# Altium PCB Dashboard_10.0.PcbDoc (part 3 of 3)
Units mm, origin at the board's own origin, x right, y up, seen from the top; angles counter-clockwise.
Board outline 113 x 67 mm, 2 copper layers (Top Layer, Bottom Layer), stack 1.671 mm thick; 178 components, 204 nets, 614 pads, 115 vias.
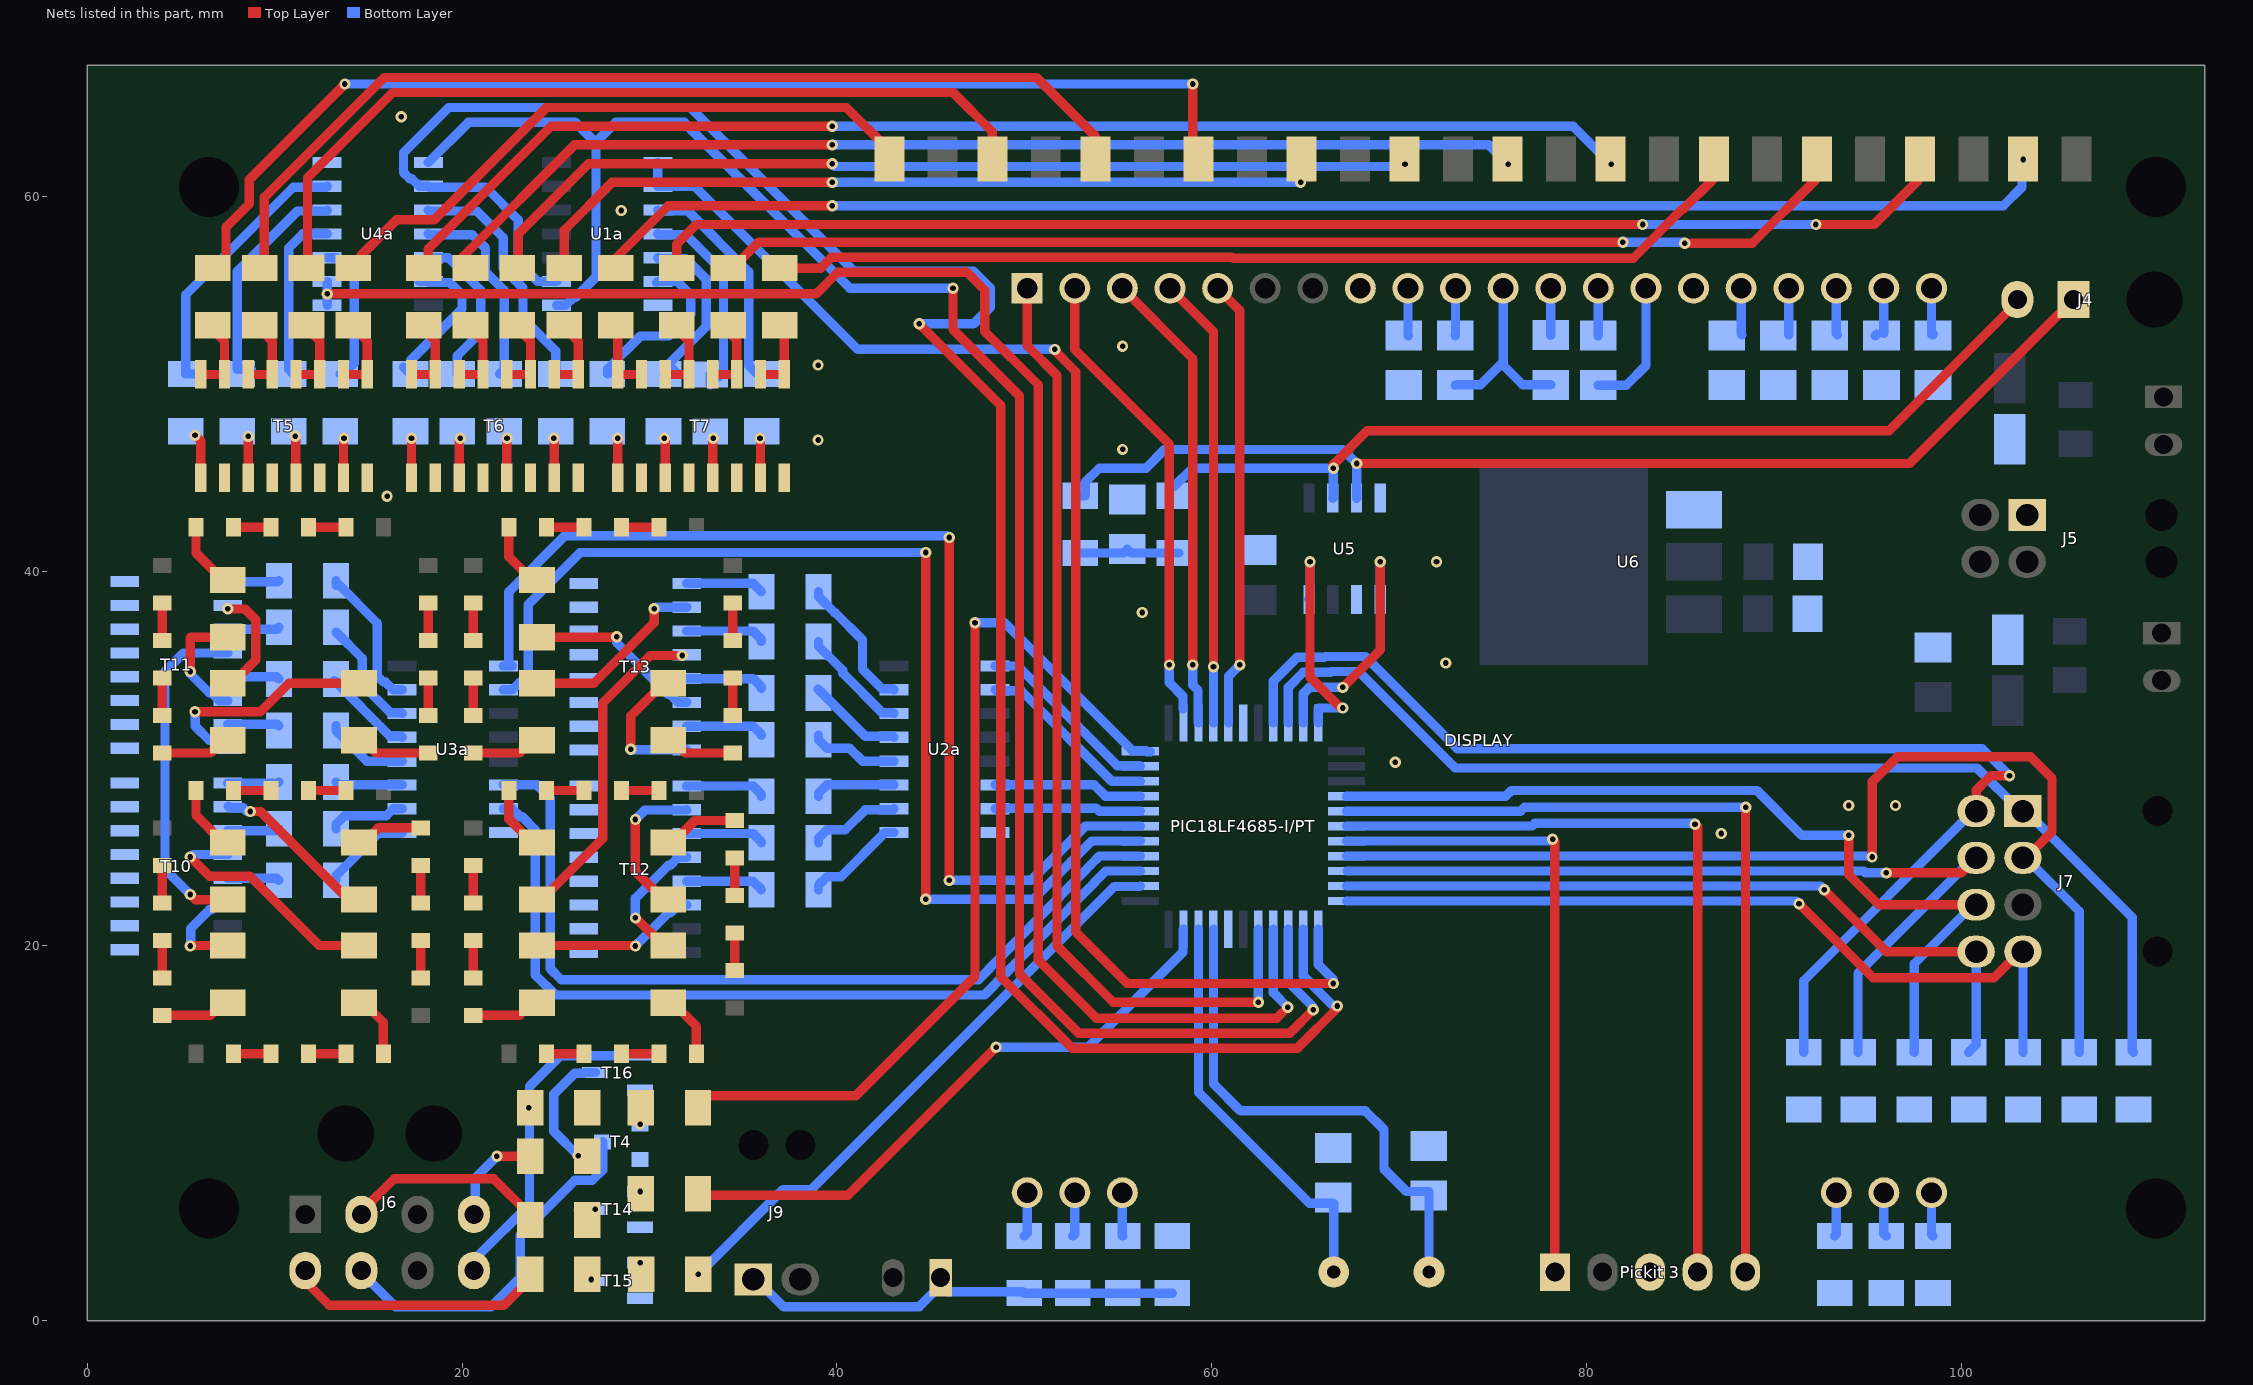
[diagram p2: the nets of this part, all layers, seen from the top]

## Via types
v1: diameter 0.6, hole 0.3, Top Layer to Bottom Layer, 115 vias

## Nets (pads, with @x,y where several pads share a name; then routed paths per layer and width w, separated by ;. In a path a pad name is that pad's centre, name@x,y a point inside that pad or via, vN(x,y) a via of type N, cw(c..) or ccw(c..) an arc to the next point about the centre after c; other vN are vias at no path point) (continued)
A1: R45.2 T13.13 | length 4.2
  Bottom Layer w0.5: T13.13@32,34.27 35.525,34.27 35.975,33.82 R45.2@35.975,33.75
A2: R52.2 T11.13 | length 2.8
  Bottom Layer w0.5: T11.13@7.5,34.365 10.11,34.365 R52.2@10.225,34.25
B1: R46.2 T13.15 | length 4.2
  Bottom Layer w0.5: T13.15@32,31.73 35.525,31.73 35.975,31.28 R46.2@35.975,31.25
B2: R53.2 T11.15 | length 2.8
  Bottom Layer w0.5: T11.15@7.5,31.825 10.15,31.825 R53.2@10.225,31.75
BG1: R34.1 T5.15 | length 2.1
  Top Layer w0.5: T5.15@13.675,45 13.675,47.075 v1(13.7,47.1)
BG2: R37.1 T5.13 | length 2.3
  Top Layer w0.5: v1@11.1,47.1 v1(11.1,47.2) 11.135,47.165 T5.13@11.135,45
BG3: R40.1 T5.11 | length 2.2
  Top Layer w0.5: T5.11@8.595,45 v1(8.595,47.195) v1@8.6,47.2
BG4: R60.1 T5.9 | length 2.4
  Top Layer w0.5: v1(5.75,47.25) 6.055,46.945 T5.9@6.055,45
BG5: R41.2 T6.15 | length 2.1
  Top Layer w0.5: v1(24.9,47.1) 24.925,47.075 T6.15@24.925,45
BG6: R38.2 T6.13 | length 2.1
  Top Layer w0.5: T6.13@22.385,45 22.385,47.085 v1(22.4,47.1)
BG7: R35.2 T6.11 | length 2.1
  Top Layer w0.5: T6.11@19.845,45 19.845,47.045 v1(19.9,47.1)
BG8: R12.2 T6.9 | length 2.1
  Top Layer w0.5: v1(17.3,47.1) 17.305,47.095 T6.9@17.305,45
BG9: R33.1 T7.15 | length 2.1
  Top Layer w0.5: v1(35.9,47.1) 35.925,47.075 T7.15@35.925,45
BG10: R36.1 T7.13 | length 2.1
  Top Layer w0.5: T7.13@33.385,45 33.385,47.085 v1(33.4,47.1)
BG11: R39.1 T7.11 | length 2.1
  Top Layer w0.5: v1(30.8,47.1) 30.845,47.055 T7.11@30.845,45
BG12: R57.1 T7.9 | length 2.1
  Top Layer w0.5: v1(28.3,47.1) 28.305,47.095 T7.9@28.305,45
BUZZER: J6.7 T4.3 | length 19.7
  Top Layer w0.5: J6.7@14.63,2.525 J6.7@14.63,2.675
  Bottom Layer w0.5: J6.7@14.6,2.6 16.45,0.75 21.543,0.75 23.1,2.307 23.1,4.578 26.022,7.5 26.954,7.5 27.5,8.046 T4.3@27.5,9.546
C1: R47.2 T12.9 | length 4.3
  Bottom Layer w0.5: T12.9@32,28.54 35.525,28.54 35.975,28.09 R47.2@35.975,28
C2: R54.2 T10.9 | length 2.7
  Bottom Layer w0.5: T10.9@7.5,28.695 10.17,28.695 R54.2@10.225,28.75
CANH: J4.1 R200.1 U5.7 | length 60.3
  Top Layer w0.5: v1(67.75,45.75) 97.25,45.75 105.25,53.75 105.4,53.75 106,54.35 J4.1@106,54.5
  Bottom Layer w0.5: R200.1@53,44.025 53.25,44.025 53.25,44.75 54,45.5 56.5,45.5 57.492,46.492 67.008,46.492 v1(67.75,45.75) ; U5.7@67.735,43.9 67.742,43.907 67.742,45.735 v1@67.758,45.75
CANL: J4.2 R201.1 U5.6 | length 51
  Top Layer w0.5: v1(66.5,45.5) 66.5,45.702 68.298,47.5 96.15,47.5 103,54.35 J4.2@103,54.5
  Bottom Layer w0.5: R201.1@58,44.525 58.975,45.5 v1(66.5,45.5) 66.5,43.935 U5.6@66.465,43.9
D1: R48.2 T12.11 | length 4.2
  Bottom Layer w0.5: T12.11@32,26 35.525,26 35.975,25.55 R48.2@35.975,25.5
D2: R55.2 T10.11 | length 2.8
  Bottom Layer w0.5: T10.11@7.5,26.155 10.13,26.155 R55.2@10.225,26.25
E1: R49.2 T12.13 | length 4.2
  Bottom Layer w0.5: T12.13@32,23.46 35.525,23.46 35.975,23.01 R49.2@35.975,23
E2: R56.2 T10.13 | length 2.8
  Bottom Layer w0.5: T10.13@7.5,23.615 10.11,23.615 R56.2@10.225,23.5
F1: R43.2 T13.9 | length 4.2
  Bottom Layer w0.5: T13.9@32,39.35 35.525,39.35 R43.2@35.975,38.9
F2: R50.2 T11.9 | length 2.7
  Bottom Layer w0.5: T11.9@7.5,39.445 10.17,39.445 R50.2@10.225,39.5
G1: R44.2 T13.11 | length 4.3
  Bottom Layer w0.5: T13.11@32,36.81 35.525,36.81 35.975,36.36 R44.2@35.975,36.25
G2: R51.2 T11.11 | length 2.8
  Bottom Layer w0.5: T11.11@7.5,36.905 10.13,36.905 R51.2@10.225,37
GND: "Pickit 3.3" C1.2 C3.1 C4.1 C5.1 C6.2 C10.2 C11.2 C12.2 C13.2 C14.2 C15b.2 C16.2 C200.2 D1.2 D2.2 DISPLAY.26 DISPLAY.33 J5.1 PIC18LF4685-I/PT.6 PIC18LF4685-I/PT.29 R1.1 R2.1 R3.1 R4.1 R5.1 R6.1 R7.1 R67.2 R68.2 R69.2 R70.2 R78.1 T4.2 T5.10 T5.12 T5.14 T5.16 T6.10 T6.12 T6.14 T6.16 T7.10 T7.12 T7.14 T7.16 T10.1 T10.2 T10.3 T10.4 T10.5 T10.6 T10.7 T10.8 T11.1 T11.2 T11.3 T11.4 T11.5 T11.6 T11.7 T11.8 T12.1 T12.2 T12.3 T12.4 T12.5 T12.6 T12.7 T12.8 T13.1 T13.2 T13.3 T13.4 T13.5 T13.6 T13.7 T13.8 T14.2 T15.2 T16.2 U1a.7 U2a.8 U3a.8 U4a.7 U5.2 U5.8 U6.3
  other v1: 87.2,26 94,27.5 96.5,27.5 69.8,29.8 72.5,35.1 56.3,37.8 72,40.5 16,44 55.25,46.5 39,47 39,51 55.25,52 28.5,59.25 16.75,64.25
LED_AMS: J6.2 R71.2 | length 11.8
  Top Layer w0.5: J6.2@14.63,5.675 14.63,5.825 16.38,7.575 21.685,7.575 23.635,5.625 R71.2@23.635,5.375 23.635,5.125 R71.2@23.185,4.675
LED_IMD: J6.8 R72.2 | length 14.1
  Top Layer w0.5: J6.8@11.63,2.675 11.63,2.105 12.91,0.825 22.235,0.825 23.635,2.225 R72.2@23.635,2.475 R72.2@23.535,2.375
LED_TS: J6.4 R79.2 | length 6.3
  Top Layer w0.5: v1(21.86,8.775) R79.2@23.635,8.775 23.635,9.025 R79.2@23.185,9.475
  Bottom Layer w0.5: J6.4@20.7,5.6 20.7,7.615 v1(21.86,8.775)
MCLR: "Pickit 3.1" PIC18LF4685-I/PT.18 | length 34.2
  Top Layer w0.5: v1(78.2,25.7) 78.32,25.58 78.32,2.6
  Bottom Layer w0.5: PIC18LF4685-I/PT.18@67.2,25.6 78.073,25.6 78.173,25.7 v1(78.2,25.7)
NetC6_1: C6.1 DISPLAY.32 | length 2.5
  Bottom Layer w0.5: DISPLAY.32@70.48,55.1 70.48,52.595 C6.1@70.5,52.575
NetC7_1: C7.1 DISPLAY.31 | length 2.5
  Bottom Layer w0.5: C7.1@73,52.575 73.02,52.595 DISPLAY.31@73.02,55.1
NetC7_2: C7.2 C8.2 DISPLAY.30 | length 10.2
  Bottom Layer w0.5: C7.2@73,49.925 73.025,49.95 74.35,49.95 75.56,51.16 ; DISPLAY.30@75.56,55.1 75.56,51.16 ; C8.2@78.1,49.95 76.6,49.95 75.56,50.99 75.56,51.16
NetC8_1: C8.1 DISPLAY.29 | length 2.5
  Bottom Layer w0.5: C8.1@78.1,52.6 DISPLAY.29@78.1,55.1
NetC9_1: C9.1 DISPLAY.27 | length 7.1
  Bottom Layer w0.5: C9.1@80.625,49.925 82.125,49.925 83.18,50.98 DISPLAY.27@83.18,55.1
NetC9_2: C9.2 DISPLAY.28 | length 2.5
  Bottom Layer w0.5: C9.2@80.625,52.575 80.64,52.59 DISPLAY.28@80.64,55.1
NetC10_1: C10.1 DISPLAY.25 | length 2.5
  Bottom Layer w0.5: DISPLAY.25@88.26,55.1 88.26,52.665 C10.1@88.3,52.625
NetC11_1: C11.1 DISPLAY.24 | length 2.5
  Bottom Layer w0.5: C11.1@90.8,52.625 DISPLAY.24@90.8,55.1
NetC12_1: C12.1 DISPLAY.23 | length 2.5
  Bottom Layer w0.5: DISPLAY.23@93.34,55.1 93.34,52.685 C12.1@93.4,52.625
NetC13_1: C13.1 DISPLAY.22 | length 2.5
  Bottom Layer w0.5: C13.1@95.425,52.575 C13.1@95.505,52.655 ; C13.1@95.88,52.705 DISPLAY.22@95.88,55.1
NetC14_1: C14.1 DISPLAY.21 | length 2.5
  Bottom Layer w0.5: C14.1@98.42,52.645 DISPLAY.21@98.42,55.1 ; C14.1@98.5,52.625 C14.1@98.52,52.645
NetC15b_1: C15b.1 CRYSTAL.2 PIC18LF4685-I/PT.31 | length 22
  Bottom Layer w0.5: PIC18LF4685-I/PT.31@59.3,20.9 59.3,12.2 65.225,6.275 66.5,6.275 66.52,6.255 CRYSTAL.2@66.52,2.6
NetC16_1: C16.1 CRYSTAL.1 PIC18LF4685-I/PT.30 | length 27.7
  Bottom Layer w0.5: PIC18LF4685-I/PT.30@60.1,20.9 60.1,12.65 61.55,11.2 68.2,11.2 69.2,10.2 69.2,8.1 70.4,6.9 71.6,6.9 C16.1@71.6,6.675 CRYSTAL.1@71.6,2.6
NetC200_1: C200.1 R200.2 R201.2 | length 5.7
  Bottom Layer w0.5: R200.2@52.75,40.975 55.3,40.975 C200.1@55.5,41.175 55.7,40.975 R201.2@58.25,40.975
NetD3_1: D3.1 R20.1 | length 33.2
  Top Layer w0.5: R20.1@14.2,56.175 14.578,56.553 14.578,56.828 16.5,58.75 18.5,58.75 24.5,64.75 40.5,64.75 D3.1@42.725,62.525
NetD4_1: D4.1 R21.1 | length 45.9
  Top Layer w0.5: R21.1@11.7,56.175 11.95,56.175 11.75,56.375 11.75,61 16.3,65.55 46.2,65.55 48.3,63.45 D4.1@48.3,62
NetD5_1: D5.1 R22.1 | length 53.4
  Top Layer w0.5: R22.1@9.2,56.175 9.45,56.425 9.45,59.95 15.85,66.35 50.65,66.35 53.8,63.2 D5.1@53.8,62
NetD6_1: D6.1 R23.1 | length 62.3
  Top Layer w0.5: R23.1@6.7,56.175 6.95,56.175 7.4,56.625 7.4,58.359 8.65,59.609 8.65,60.9 v1(13.75,66) ; v1(59,66) 59,62.3 D6.1@59.3,62
  Bottom Layer w0.5: v1(13.75,66) v1(59,66)
NetD7_1: D7.1 R24.1 | length 43.7
  Top Layer w0.5: R24.1@25.45,56.175 25.45,58.2 28,60.75 v1(39.75,60.75) ; v1(64.75,60.75) 64.75,61.95 D7.1@64.8,62
  Bottom Layer w0.5: v1(39.75,60.75) v1(64.75,60.75)
NetD8_1: D8.1 R25.1 | length 51.1
  Top Layer w0.5: R25.1@22.95,56.175 23.2,56.175 23,56.375 23,58 26.75,61.75 v1(39.75,61.75)
  Bottom Layer w0.5: v1(39.75,61.75) 39.9,61.6 v1@70.325,61.6
  other v1: 70.325,61.725
NetD9_1: D9.1 R26.1 | length 59.8
  Top Layer w0.5: R26.1@20.45,56.175 20.7,56.175 20.063,56.813 26,62.75 v1(39.75,62.75)
  Bottom Layer w0.5: v1(39.75,62.75) 74.8,62.75 v1(75.825,61.725)
NetD10_1: D10.1 R27.1 | length 67.9
  Top Layer w0.5: R27.1@17.95,56.175 18.2,56.175 18.2,57.2 24.75,63.75 v1(39.75,63.75)
  Bottom Layer w0.5: v1(39.75,63.75) 79.293,63.75 v1@81.322,61.722
  other v1: 81.325,61.725
NetD11_1: D11.1 R28.1 | length 52.2
  Top Layer w0.5: R28.1@36.95,56.175 39.144,56.175 39.719,56.75 61.109,56.75 61.159,56.7 82.498,56.7 85.148,59.35 85.2,59.35 D11.1@86.725,60.875 ; D11.1@86.8,61.6 D11.1@86.8,62
NetD12_1: D12.1 R29.1 | length 60.4
  Top Layer w0.5: R29.1@34.2,56.175 34.45,56.175 35.825,57.55 v1(81.95,57.55) ; v1(85.25,57.5) 88.85,57.5 D12.1@92.225,60.875 ; D12.1@92.3,61.6 D12.1@92.3,62
  Bottom Layer w0.5: v1(81.95,57.55) 85.2,57.55 v1(85.25,57.5)
NetD13_1: D13.1 R30.1 | length 69.4
  Top Layer w0.5: R30.1@31.45,56.175 31.45,57.45 32.5,58.5 v1(83,58.5) ; v1(92.25,58.5) 95.35,58.5 D13.1@97.725,60.875 ; D13.1@97.8,61.6 D13.1@97.8,62
  Bottom Layer w0.5: v1(83,58.5) v1(92.25,58.5)
NetD14_1: D14.1 R31.1 | length 78.6
  Top Layer w0.5: R31.1@28.2,56.175 28.2,56.7 31,59.5 v1(39.75,59.5)
  Bottom Layer w0.5: v1(39.75,59.5) 102.25,59.5 103.25,60.5 v1@103.25,61.975
  other v1: 103.325,61.975
NetD15_1: D15.1 D22.2 | length 2
  Top Layer w0.5: D15.1@24.5,14.25 D22.2@26.5,14.25
NetD16_1: D16.1 D23.2 | length 2
  Top Layer w0.5: D16.1@34.55,18.7 D23.2@34.55,20.7
NetD17_1: D17.1 D24.2 | length 2
  Top Layer w0.5: D24.2@34.45,36.3 D17.1@34.45,38.3
NetD18_1: D18.1 D25.2 | length 2
  Top Layer w0.5: D25.2@28.5,42.35 D18.1@30.5,42.35
NetD19_1: D19.1 D26.2 | length 2
  Top Layer w0.5: D26.2@28.5,28.3 D19.1@30.5,28.3
NetD20_1: D20.1 D27.2 | length 2
  Top Layer w0.5: D27.2@20.6,36.3 D20.1@20.6,38.3
NetD21_1: D21.1 D28.2 | length 2
  Top Layer w0.5: D28.2@20.6,18.3 D21.1@20.6,20.3
NetD21_2: D21.2 D.1 | length 2
  Top Layer w0.5: D21.2@20.6,22.3 D.1@20.6,24.3
NetD22_1: D22.1 D29.2 | length 2
  Top Layer w0.5: D22.1@28.5,14.25 D29.2@30.5,14.25
NetD23_1: D23.1 D30.2 | length 2
  Top Layer w0.5: D23.1@34.55,22.7 D30.2@34.55,24.7
NetD24_1: D24.1 D31.2 | length 2
  Top Layer w0.5: D31.2@34.45,32.3 D24.1@34.45,34.3
NetD25_1: D25.1 D32.2 | length 2
  Top Layer w0.5: D32.2@24.5,42.35 D25.1@26.5,42.35
NetD26_1: D26.1 D33.2 | length 2
  Top Layer w0.5: D33.2@24.5,28.3 D26.1@26.5,28.3
NetD27_1: D27.1 D34.2 | length 2
  Top Layer w0.5: D34.2@20.6,32.3 D27.1@20.6,34.3
NetD28_1: D28.1 R.2 | length 3.7
  Top Layer w0.5: D28.1@20.6,16.3 23.075,16.3 23.75,16.975 R.2@24,16.975
NetD29_1: D29.1 R42.2 | length 3.5
  Top Layer w0.5: R42.2@31,16.975 31.25,16.975 32.5,15.725 D29.1@32.5,14.25
NetD30_1: D30.1 R58.2 | length 4
  Top Layer w0.5: R58.2@31,25.525 31.25,25.525 32.425,26.7 D30.1@34.55,26.7
NetD31_1: D31.1 R59.2 | length 3.7
  Top Layer w0.5: R59.2@31,30.975 31.25,30.975 31.925,30.3 D31.1@34.45,30.3
NetD32_1: D32.1 R61.2 | length 3.6
  Top Layer w0.5: D32.1@22.5,42.35 22.5,40.775 23.75,39.525 R61.2@24,39.525
NetD33_1: D33.1 R62.2 | length 3.5
  Top Layer w0.5: D33.1@22.5,28.3 22.5,26.775 23.75,25.525 R62.2@24,25.525
NetD34_1: D34.1 R63.2 | length 3.7
  Top Layer w0.5: D34.1@20.6,30.3 23.075,30.3 23.75,30.975 R63.2@24,30.975
NetD35_1: D35.1 D42.2 | length 2
  Top Layer w0.5: D42.2@4,22.3 D35.1@4,24.3
NetD36_1: D36.1 D43.2 | length 2
  Top Layer w0.5: D36.1@7.8,14.25 D43.2@9.8,14.25
NetD37_1: D37.1 D44.2 | length 2
  Top Layer w0.5: D37.1@17.8,18.3 D44.2@17.8,20.3
NetD38_1: D38.1 D45.2 | length 2
  Top Layer w0.5: D45.2@18.2,36.3 D38.1@18.2,38.3
NetD39_1: D39.1 D46.2 | length 2
  Top Layer w0.5: D46.2@11.8,42.35 D39.1@13.8,42.35
NetD40_1: D40.1 D47.2 | length 2
  Top Layer w0.5: D47.2@11.8,28.3 D40.1@13.8,28.3
NetD41_1: D41.1 D48.2 | length 2
  Top Layer w0.5: D48.2@4,36.3 D41.1@4,38.3
NetD42_1: D42.1 D49.2 | length 2
  Top Layer w0.5: D49.2@4,18.3 D42.1@4,20.3
NetD43_1: D43.1 D50.2 | length 2
  Top Layer w0.5: D43.1@11.8,14.25 D50.2@13.8,14.25
NetD44_1: D44.1 D51.2 | length 2
  Top Layer w0.5: D44.1@17.8,22.3 D51.2@17.8,24.3
NetD45_1: D45.1 D52.2 | length 2
  Top Layer w0.5: D52.2@18.2,32.3 D45.1@18.2,34.3
NetD46_1: D46.1 D53.2 | length 2
  Top Layer w0.5: D53.2@7.8,42.35 D46.1@9.8,42.35
NetD47_1: D47.1 D54.2 | length 2
  Top Layer w0.5: D54.2@7.8,28.3 D47.1@9.8,28.3
NetD48_1: D48.1 D55.2 | length 2
  Top Layer w0.5: D55.2@4,32.3 D48.1@4,34.3
NetD49_1: D49.1 R73.2 | length 3.8
  Top Layer w0.5: D49.1@4,16.3 6.575,16.3 7.25,16.975 R73.2@7.5,16.975
NetD50_1: D50.1 R74.2 | length 3.4
  Top Layer w0.5: R74.2@14.5,16.975 14.75,16.975 15.8,15.925 D50.1@15.8,14.25
NetD51_1: D51.1 R75.2 | length 3.6
  Top Layer w0.5: R75.2@14.5,25.525 14.75,25.525 15.525,26.3 D51.1@17.8,26.3
NetD52_1: D52.1 R76.2 | length 4
  Top Layer w0.5: R76.2@14.5,30.975 14.75,30.975 15.425,30.3 D52.1@18.2,30.3
NetD53_1: D53.1 R77.2 | length 3.7
  Top Layer w0.5: D53.1@5.8,42.35 5.8,40.975 7.25,39.525 R77.2@7.5,39.525
NetD54_1: D54.1 R82.2 | length 3.6
  Top Layer w0.5: D54.1@5.8,28.3 5.8,26.975 7.25,25.525 R82.2@7.5,25.525
NetD55_1: D55.1 R83.2 | length 3.8
  Top Layer w0.5: D55.1@4,30.3 6.575,30.3 7.25,30.975 R83.2@7.5,30.975
NetDISPLAY_41: DISPLAY.41 R64.2 | length 2.4
  Bottom Layer w0.5: R64.2@50,4.525 50.16,4.685 DISPLAY.41@50.16,6.84
NetDISPLAY_42: DISPLAY.42 R65.2 | length 2.4
  Bottom Layer w0.5: R65.2@52.6,4.525 52.7,4.625 DISPLAY.42@52.7,6.84
NetDISPLAY_43: DISPLAY.43 R66.2 | length 2.3
  Bottom Layer w0.5: DISPLAY.43@55.24,6.84 55.24,4.535 R66.2@55.25,4.525
NetDISPLAY_44: DISPLAY.44 R68.1 | length 2.3
  Bottom Layer w0.5: DISPLAY.44@98.42,6.84 98.42,4.605 R68.1@98.5,4.525
NetDISPLAY_45: DISPLAY.45 R69.1 | length 2.4
  Bottom Layer w0.5: DISPLAY.45@95.88,6.84 95.88,4.645 R69.1@96,4.525
NetDISPLAY_46: DISPLAY.46 R67.1 | length 2.4
  Bottom Layer w0.5: R67.1@93.25,4.525 93.34,4.615 DISPLAY.46@93.34,6.84
NetJ8_1: J8.1 J9.1 R64.1 R65.1 R66.1 R70.1 | length 24
  Bottom Layer w0.5: J9.1@35.55,2.21 35.7,2.21 37.16,0.75 44.39,0.75 J8.1@45.54,1.9 ; J8.1@45.54,2.3 J8.1@45.54,1.9 ; R70.1@57.9,1.475 R66.1@55.25,1.475 R65.1@52.6,1.475 R64.1@50,1.475 49.925,1.55 45.89,1.55 J8.1@45.54,1.9
NetR12_1: R12.1 U4a.13 | length 8.8
  Bottom Layer w0.5: R12.1@16.875,50.9 R12.1@17.25,50.525 17.5,50.525 17.25,50.775 17.25,51.25 20,54 20,54.75 19.34,55.41 18.25,55.41 U4a.13@18.2,55.46 U4a.13@17.725,55.46
NetR20_2: R20.2 T5.1 T5.2 | length 3.9
  Top Layer w0.5: T5.2@13.675,50.5 T5.1@14.945,50.5 14.945,52.275 14.495,52.725 R20.2@14.25,52.725
NetR21_2: R21.2 T5.3 T5.4 | length 3.9
  Top Layer w0.5: T5.4@11.135,50.5 T5.3@12.405,50.5 12.405,52.275 11.955,52.725 R21.2@11.75,52.725
NetR22_2: R22.2 T5.5 T5.6 | length 3.8
  Top Layer w0.5: T5.6@8.595,50.5 T5.5@9.865,50.5 9.865,52.275 9.415,52.725 R22.2@9.25,52.725
NetR23_2: R23.2 T5.7 T5.8 | length 3.8
  Top Layer w0.5: T5.8@6.055,50.5 T5.7@7.325,50.5 7.325,52.275 6.875,52.725 R23.2@6.75,52.725
NetR24_2: R24.2 T6.1 T6.2 | length 3.9
  Top Layer w0.5: T6.2@24.925,50.5 T6.1@26.195,50.5 26.195,52.275 25.745,52.725 R24.2@25.5,52.725
NetR25_2: R25.2 T6.3 T6.4 | length 3.9
  Top Layer w0.5: T6.4@22.385,50.5 T6.3@23.655,50.5 23.655,52.275 23.205,52.725 R25.2@23,52.725
NetR26_2: R26.2 T6.5 T6.6 | length 3.8
  Top Layer w0.5: T6.6@19.845,50.5 T6.5@21.115,50.5 21.115,52.275 20.665,52.725 R26.2@20.5,52.725
NetR27_2: R27.2 T6.7 T6.8 | length 3.8
  Top Layer w0.5: T6.8@17.305,50.5 T6.7@18.575,50.5 18.575,52.275 18.125,52.725 R27.2@18,52.725
NetR28_2: R28.2 T7.1 T7.2 | length 3.6
  Top Layer w0.5: T7.2@35.925,50.5 T7.1@37.195,50.5 37.195,52.53 R28.2@37,52.725
NetR29_2: R29.2 T7.3 T7.4 | length 3.7
  Top Layer w0.5: T7.4@33.385,50.5 T7.3@34.655,50.5 34.655,52.345 34.275,52.725 R29.2@34.25,52.725
NetR30_2: R30.2 T7.5 T7.6 | length 3.8
  Top Layer w0.5: T7.6@30.845,50.5 T7.5@32.115,50.5 32.115,52.275 31.665,52.725 R30.2@31.5,52.725
NetR31_2: R31.2 T7.7 T7.8 | length 3.6
  Top Layer w0.5: R31.2@28.25,52.725 28.305,52.67 T7.8@28.305,50.5 T7.7@29.575,50.5 T7.7@29.525,50.55
NetR32_2: R32.2 T4.1 | length 1.3
  Top Layer w0.5: R32.2@29.517,10.513 29.517,11.358 R32.2@29.535,11.375 R32.2@29.535,11.125
  Bottom Layer w0.5: v1(29.5,10.496) T4.1@29.65,10.646
NetR33_2: R33.2 U1a.3 | length 12.1
  Bottom Layer w0.5: U1a.3@30.45,59.27 30.5,59.22 32.055,59.22 35.3,55.975 35.3,50.975 35.75,50.525 R33.2@36,50.525
NetR34_2: R34.2 U4a.3 | length 7.6
  Bottom Layer w0.5: U4a.3@12.8,56.73 13.275,56.73 13.695,56.31 13.803,56.31 14.25,55.863 14.25,51.1 13.675,50.525 R34.2@13.5,50.525
NetR35_1: R35.1 U4a.12 | length 8.5
  Bottom Layer w0.5: U4a.12@18.2,56.73 19.27,56.73 21,55 21,52.75 19.75,51.5 R35.1@19.75,50.525
NetR36_2: R36.2 U1a.4 | length 11.2
  Bottom Layer w0.5: U1a.4@30.45,58 30.5,57.95 31.95,57.95 33.95,55.95 33.95,50.65 33.25,49.95 R36.2@33.25,50.5
NetR37_2: R37.2 U4a.4 | length 9.2
  Bottom Layer w0.5: R37.2@11,50.525 10.75,50.775 10.75,57.25 11.5,58 U4a.4@12.8,58
NetR38_1: R38.1 U4a.11 | length 10.9
  Bottom Layer w0.5: U4a.11@18.2,58 18.25,57.95 20.55,57.95 21.25,57.25 21.25,55.987 22.25,54.987 22.25,50.775 22,50.525 R38.1@22.25,50.525
NetR39_2: R39.2 U1a.5 | length 9.9
  Bottom Layer w0.5: U1a.5@30.45,56.73 30.5,56.68 31.945,56.68 33.025,55.6 33.025,53.05 31,51.025 31.5,50.525 R39.2@30.75,50.525
NetR40_2: R40.2 U4a.5 | length 12.1
  Bottom Layer w0.5: R40.2@8.75,50.775 8,50.775 8,56 11.22,59.22 12.75,59.22 U4a.5@12.8,59.27
NetR41_1: R41.1 U4a.10 | length 13
  Bottom Layer w0.5: U4a.10@18.2,59.27 18.25,59.22 20.78,59.22 22.2,57.8 22.2,56.169 23.25,55.119 23.25,53.5 25,51.75 R41.1@25,50.525
NetR42_1: R42.1 T12.12 | length 7.1
  Top Layer w0.5: v1(29.25,21.5) 29.275,21.5 30.75,20.025 R42.1@31,20.025
  Bottom Layer w0.5: v1(29.25,21.5) 29.252,21.502 29.252,22.55 31.012,24.31 31.12,24.31 31.54,24.73 T12.12@32,24.73
NetR43_1: R43.1 U2a.15 | length 7.2
  Bottom Layer w0.5: R43.1@39.025,38.9 39.025,38.65 39.894,37.781 39.921,37.781 41.369,36.334 41.369,34.773 42.417,33.725 43,33.725 U2a.15@43.05,33.675
NetR44_1: R44.1 U2a.14 | length 5.9
  Bottom Layer w0.5: R44.1@39.025,36.25 39.025,36 40.311,34.714 40.311,34.561 42.417,32.455 43,32.455 U2a.14@43.05,32.405
NetR45_1: R45.1 U2a.13 | length 5.1
  Bottom Layer w0.5: R45.1@38.993,33.717 41.525,31.185 43,31.185 U2a.13@43.05,31.135
NetR46_1: R46.1 U2a.12 | length 4.7
  Bottom Layer w0.5: R46.1@39.025,31.25 R46.1@39.025,31 39.475,30.55 40.683,30.55 41.367,29.865 U2a.12@43.05,29.865
NetR47_1: R47.1 U2a.11 | length 4.4
  Bottom Layer w0.5: R47.1@39.025,28 39.025,28.145 39.475,28.595 U2a.11@43.05,28.595
NetR48_1: R48.1 U2a.10 | length 4.9
  Bottom Layer w0.5: R48.1@39.025,25.5 39.025,25.75 39.475,26.2 40.45,26.2 41.525,27.275 43,27.275 U2a.10@43.05,27.325
NetR49_1: R49.1 U2a.9 | length 5.4
  Bottom Layer w0.5: R49.1@39.025,23 39.025,23.25 39.475,23.7 40.22,23.7 42.575,26.055 U2a.9@43.05,26.055
NetR50_1: R50.1 U3a.15 | length 7.7
  Bottom Layer w0.5: R50.1@13.275,39.25 R50.1@13.275,39.5 ; R50.1@13.364,39.339 15.475,37.228 15.475,34.417 15.797,34.095 15.905,34.095 16.325,33.675 U3a.15@16.8,33.675
NetR51_1: R51.1 U3a.14 | length 6.1
  Bottom Layer w0.5: R51.1@13.275,36.75 14.675,35.35 14.675,33.947 16.167,32.455 16.75,32.455 U3a.14@16.8,32.405
NetR52_1: R52.1 U3a.13 | length 4.9
  Bottom Layer w0.5: R52.1@13.189,34.164 16.167,31.185 16.75,31.185 U3a.13@16.8,31.135
NetR53_1: R53.1 U3a.12 | length 4.5
  Bottom Layer w0.5: R53.1@13.275,31.75 R53.1@13.275,31.5 14.91,29.865 U3a.12@16.8,29.865
NetR54_1: R54.1 U3a.11 | length 3.6
  Bottom Layer w0.5: R54.1@13.275,28.75 13.43,28.595 U3a.11@16.8,28.595
NetR55_1: R55.1 U3a.10 | length 4.1
  Bottom Layer w0.5: R55.1@13.275,26.25 13.275,26.5 13.725,26.95 15.95,26.95 16.325,27.325 U3a.10@16.8,27.325
NetR56_1: R56.1 U3a.9 | length 4.7
  Bottom Layer w0.5: R56.1@13.275,23.5 13.275,23.75 15.53,26.005 16.75,26.005 U3a.9@16.8,26.055
NetR57_2: R57.2 U1a.6 | length 9
  Bottom Layer w0.5: R57.2@27.775,50.525 27.775,50.8 29.525,52.55 31.025,52.55 32.2,53.725 32.2,54.742 31.482,55.46 U1a.6@30.45,55.46 U1a.6@30.4,55.41
NetR58_1: R58.1 T12.10 | length 8.1
  Top Layer w0.5: v1(29.25,26.75) 29.25,23.975 30.75,22.475 R58.1@31,22.475
  Bottom Layer w0.5: v1(29.25,26.75) 29.76,27.26 31.99,27.26 T12.10@32,27.27
NetR59_1: R59.1 T13.16 | length 7.5
  Top Layer w0.5: v1(29,30.5) 29,32.275 30.75,34.025 R59.1@31,34.025
  Bottom Layer w0.5: v1(29,30.5) 29.019,30.481 31.979,30.481 T13.16@32,30.46
NetR60_2: R60.2 U4a.6 | length 14.9
  Bottom Layer w0.5: R60.2@6,50.525 R60.2@5.25,50.525 5.25,54.75 10.99,60.49 12.75,60.49 U4a.6@12.8,60.54
NetR61_1: R61.1 T13.14 | length 9.6
  Top Layer w0.5: R61.1@24,36.475 28.225,36.475 v1(28.25,36.5)
  Bottom Layer w0.5: v1(28.25,36.5) 28.25,36.182 31.012,33.42 31.12,33.42 31.54,33 T13.14@32,33
NetR62_1: R62.1 T13.12 | length 17.4
  Top Layer w0.5: R62.1@24,22.475 24.25,22.475 27.5,25.725 27.5,32.953 30.047,35.5 v1(31.75,35.5)
NetR63_1: R63.1 T13.10 | length 10.1
  Top Layer w0.5: R63.1@24,34.025 27.025,34.025 30.25,37.25 v1(30.25,38)
  Bottom Layer w0.5: v1(30.25,38) 30.277,38 30.357,38.08 T13.10@32,38.08
NetR71_1: R71.1 T14.3 | length 1
  Top Layer w0.5: R71.1@26.5,5.9 26.21,5.9 26.685,5.425 R71.1@26.685,5.375
  other v1: 27.1,5.946
NetR72_1: R72.1 T15.3 | length 1.4
  Top Layer w0.5: R72.1@26.31,2.1 R72.1@26.685,2.475 26.685,2.725 R72.1@27.135,3.175
  other v1: 26.9,2.2
NetR73_1: R73.1 T10.14 | length 5.5
  Top Layer w0.5: v1(5.5,20) 5.525,20.025 R73.1@7.5,20.025
  Bottom Layer w0.5: v1(5.5,20) 5.519,20.019 5.519,20.932 6.512,21.925 6.62,21.925 7.04,22.345 T10.14@7.5,22.345
NetR74_1: R74.1 T10.12 | length 13
  Top Layer w0.5: v1(5.5,24.75) 6.525,23.725 8.678,23.725 12.378,20.025 R74.1@14.5,20.025
  Bottom Layer w0.5: v1(5.5,24.75) 5.527,24.75 5.662,24.885 T10.12@7.5,24.885
NetR75_1: R75.1 T10.10 | length 9
  Top Layer w0.5: v1(8.7,27.175) 9.247,27.175 13.947,22.475 R75.1@14.5,22.475
  Bottom Layer w0.5: T10.10@7.525,27.45 7.6,27.375 8.325,27.375 8.525,27.175 v1(8.7,27.175)
NetR76_1: R76.1 T11.16 | length 12.4
  Top Layer w0.5: v1(5.75,32.5) 9.237,32.5 10.763,34.025 R76.1@14.5,34.025
  Bottom Layer w0.5: v1(5.75,32.5) 5.769,32.481 5.769,31.718 6.512,30.975 6.62,30.975 7.04,30.555 T11.16@7.5,30.555
NetR77_1: R77.1 T11.14 | length 6.5
  Top Layer w0.5: v1(5.5,34.645) 5.5,36.45 5.525,36.475 R77.1@7.5,36.475
  Bottom Layer w0.5: v1(5.5,34.645) 5.5,34.527 6.512,33.515 6.62,33.515 7.04,33.095 T11.14@7.5,33.095
NetR79_1: R79.1 T16.3 | length 7.1
  Top Layer w0.5: v1(26.2,8.8) 26.51,8.8 26.61,8.7 R79.1@26.685,8.775
  Bottom Layer w0.5: v1(26.2,8.8) 24.9,10.1 24.9,12.1 26,13.2 26.5,13.2 26.55,13.25 27.096,13.25 T16.3@27.1,13.246
NetR80_2: R80.2 T15.1 | length 0.1
  Bottom Layer w0.5: v1(29.5,3.096) T15.1@29.55,3.046
NetR81_2: R81.2 T14.1
  other v1: 29.5,6.896
NetR82_1: R82.1 T11.12 | length 18.3
  Top Layer w0.5: v1(5.5,22.75) 5.775,22.475 R82.1@7.5,22.475
  Bottom Layer w0.5: v1(5.5,22.75) 4.15,24.1 4.15,34.65 5.135,35.635 T11.12@7.5,35.635
NetR83_1: R83.1 T11.10 | length 5.9
  Top Layer w0.5: R83.1@7.5,34.025 7.75,34.025 9,35.275 9,37.403 8.422,37.981 7.519,37.981 v1(7.5,38)
NetR_1: R.1 T12.14 | length 8.9
  Top Layer w0.5: R.1@24,20.025 29.225,20.025 v1(29.25,20)
  Bottom Layer w0.5: v1(29.25,20) 29.25,20.008 31.012,21.77 31.12,21.77 31.54,22.19 T12.14@32,22.19
P2: DISPLAY.39 PIC18LF4685-I/PT.2 | length 24.8
  Top Layer w0.5: DISPLAY.39@52.7,55.1 52.7,51.831 57.75,46.781 v1(57.75,35)
  Bottom Layer w0.5: v1(57.75,35) 57.75,34.044 58.475,33.319 PIC18LF4685-I/PT.2@58.475,32.65
P3: DISPLAY.38 PIC18LF4685-I/PT.3 | length 24.9
  Top Layer w0.5: DISPLAY.38@55.24,55.1 59,51.34 v1(59,35)
  Bottom Layer w0.5: v1(59,35) 59,33.925 59.275,33.65 59.275,31.925 PIC18LF4685-I/PT.3@59.3,31.9
P4: DISPLAY.37 PIC18LF4685-I/PT.4 | length 24.2
  Top Layer w0.5: DISPLAY.37@57.78,55.1 60.1,52.78 v1(60.1,34.9)
  Bottom Layer w0.5: PIC18LF4685-I/PT.4@60.1,31.9 v1(60.1,34.9)
P5: DISPLAY.36 PIC18LF4685-I/PT.5 | length 23.9
  Top Layer w0.5: DISPLAY.36@60.32,55.1 61.5,53.92 v1(61.5,35)
  Bottom Layer w0.5: PIC18LF4685-I/PT.5@60.9,31.9 60.9,34.4 v1(61.5,35)
P8: J7.8 PIC18LF4685-I/PT.8 R3.2 | length 64.7
  Top Layer w0.5: J7.8@100.8,27.2 100.8,28.3 101.581,29.081 v1(102.58,29.081)
  Bottom Layer w0.5: PIC18LF4685-I/PT.8@63.3,31.9 63.3,34.141 64.561,35.403 66.016,35.403 66.064,35.45 68.2,35.45 73.119,30.531 101.129,30.531 v1(102.58,29.081) ; R3.2@91.6,14.325 91.6,18.15 100.65,27.2 J7.8@100.8,27.2
P9: J7.1 PIC18LF4685-I/PT.9 R1.2 | length 60
  Bottom Layer w0.5: PIC18LF4685-I/PT.9@64.1,31.9 64.1,33.81 64.893,34.603 66.348,34.603 66.395,34.65 67.85,34.65 73,29.5 100.85,29.5 103.15,27.2 J7.1@103.3,27.2 103.45,27.2 109.13,21.52 109.13,14.395 R1.2@109.2,14.325
P15: J7.6 PIC18LF4685-I/PT.15 R5.2 | length 46.8
  Top Layer w0.5: v1(94,25.9) 94,23.8 95.6,22.2 J7.6@100.8,22.2
  Bottom Layer w0.5: PIC18LF4685-I/PT.15@67.2,28 75.7,28 76,28.3 89.1,28.3 91.5,25.9 v1(94,25.9) ; R5.2@97.5,14.325 97.5,19.05 100.65,22.2 J7.6@100.8,22.2
P19: J7.2 PIC18LF4685-I/PT.19 R6.2 | length 59.4
  Top Layer w0.5: v1(95.25,24.75) 95.25,28.75 96.6,30.1 103.7,30.1 104.85,28.95 104.85,26.1 103.45,24.7 J7.2@103.3,24.7
  Bottom Layer w0.5: PIC18LF4685-I/PT.19@67.2,24.8 95.2,24.8 v1(95.25,24.75) ; J7.2@103.3,24.7 103.45,24.7 106.3,21.85 R6.2@106.3,14.325
P20: J7.7 PIC18LF4685-I/PT.20 R2.2 | length 47
  Top Layer w0.5: v1(96,23.9) 100,23.9 J7.7@100.8,24.7
  Bottom Layer w0.5: PIC18LF4685-I/PT.20@67.225,24 94.798,24 94.898,23.9 v1(96,23.9) ; R2.2@94.5,14.325 94.5,18.55 100.65,24.7 J7.7@100.8,24.7
P21: J7.5 PIC18LF4685-I/PT.21 R7.2 | length 40.6
  Top Layer w0.5: v1(92.7,23) 96,19.7 J7.5@100.8,19.7
  Bottom Layer w0.5: PIC18LF4685-I/PT.21@67.2,23.2 92.5,23.2 v1(92.7,23) ; R7.2@100.4,14.325 100.8,14.725 J7.5@100.8,19.7
P22: J7.4 PIC18LF4685-I/PT.22 R4.2 | length 43.8
  Top Layer w0.5: v1(91.35,22.25) 95.3,18.3 101.75,18.3 103.15,19.7 J7.4@103.3,19.7
  Bottom Layer w0.5: PIC18LF4685-I/PT.22@67.2,22.4 91.2,22.4 v1(91.35,22.25) ; R4.2@103.3,14.325 J7.4@103.3,19.7
P23: PIC18LF4685-I/PT.23 U1a.1 U1a.2 | length 75.7
  Top Layer w0.5: v1(51.625,51.838) 51.625,51.775 52.75,50.65 52.75,20.75 55.5,18 v1(66.5,18)
  Bottom Layer w0.5: U1a.1@30.45,61.81 U1a.2@30.45,60.54 32.41,60.54 41.112,51.838 v1(51.625,51.838) ; PIC18LF4685-I/PT.23@65.7,20.9 65.7,18.994 66.5,18.194 v1(66.5,18)
P24: PIC18LF4685-I/PT.24 U1a.9 U4a.9 | length 116.6
  Top Layer w0.5: v1(44.4,53.2) 48.75,48.85 48.75,18.352 52.552,14.55 64.589,14.55 66.712,16.672 v1(66.712,16.8)
  Bottom Layer w0.5: U1a.9@25.05,55.46 24.04,55.46 23,56.5 23,58.75 21.26,60.49 18.25,60.49 U4a.9@18.2,60.54 17.725,60.54 17.321,60.944 17.214,60.944 16.875,61.282 16.875,62.338 19.287,64.75 32.181,64.75 40.924,56.007 47.293,56.007 48.2,55.1 48.2,54.1 47.3,53.2 v1(44.4,53.2) ; PIC18LF4685-I/PT.24@64.9,20.9 64.9,18.398 66.498,16.8 v1(66.712,16.8)
P25: PIC18LF4685-I/PT.25 U1a.8 U4a.8 | length 103.8
  Top Layer w0.5: v1(46.2,55.1) 46.2,52.9 49.75,49.35 49.75,18.5 52.9,15.35 64.187,15.35 v1(65.43,16.593)
  Bottom Layer w0.5: U4a.8@18.2,61.81 20.34,63.95 26.05,63.95 27.125,62.875 ; U1a.8@25.05,54.19 25.525,54.19 25.945,54.61 26.053,54.61 27.15,55.707 27.15,62.9 28.2,63.95 31.85,63.95 40.7,55.1 v1(46.2,55.1) ; PIC18LF4685-I/PT.25@64.1,20.9 64.1,18.067 65.43,16.737 v1(65.43,16.593)
P26: PIC18LF4685-I/PT.26 U4a.1 U4a.2 | length 93.5
  Top Layer w0.5: v1(12.8,54.8) 38.9,54.8 40.05,55.95 46.95,55.95 47.9,55 47.9,52.8 50.75,49.95 50.75,19.25 53.85,16.15 63.481,16.15 v1(64.065,16.734)
  Bottom Layer w0.5: U4a.1@12.8,54.19 U4a.2@12.8,55.46 ; PIC18LF4685-I/PT.26@63.3,20.9 63.3,17.499 v1(64.065,16.734)
P27: DISPLAY.40 PIC18LF4685-I/PT.27 | length 51.7
  Top Layer w0.5: DISPLAY.40@50.16,55.1 50.16,52.038 51.75,50.448 51.75,20 54.75,17 v1(62.5,17)
  Bottom Layer w0.5: v1(62.5,17) PIC18LF4685-I/PT.27@62.5,20.9
P32: PIC18LF4685-I/PT.32 R81.1 | length 32.5
  Top Layer w0.5: R81.1@32.585,6.7 40.6,6.7 v1(48.5,14.6)
  Bottom Layer w0.5: v1(48.5,14.6) 53.403,14.6 58.475,19.672 58.475,20.875 PIC18LF4685-I/PT.32@58.5,20.9
P35: PIC18LF4685-I/PT.35 R80.1 | length 32.2
  Bottom Layer w0.5: v1(32.61,2.475) 37.135,7 38.631,7 54.806,23.175 56.175,23.175 PIC18LF4685-I/PT.35@56.2,23.2
P36: PIC18LF4685-I/PT.36 U3a.7 | length 45.4
  Bottom Layer w0.5: U3a.7@22.2,27.325 22.675,27.325 23.095,26.905 23.203,26.905 23.9,26.208 23.9,18.469 24.984,17.384 47.884,17.384 54.35,24 PIC18LF4685-I/PT.36@56.2,24
P37: PIC18LF4685-I/PT.37 U3a.6 | length 46.4
  Bottom Layer w0.5: U3a.6@22.2,28.595 24.005,28.595 24.7,27.9 24.7,18.8 25.3,18.2 47.558,18.2 52.552,23.31 ; 52.55,23.313 52.55,23.322 53.177,23.95 53.55,24.331 54.019,24.8 PIC18LF4685-I/PT.37@56.2,24.8
P38: PIC18LF4685-I/PT.38 U3a.2 | length 59
  Top Layer w0.5: v1(44.75,22.5) v1(44.75,41)
  Bottom Layer w0.5: U3a.2@22.2,33.675 22.675,33.675 23.079,34.079 23.186,34.079 23.525,34.417 23.525,38.213 26.312,41 v1(44.75,41) ; v1(44.75,22.5) 50.5,22.5 53.6,25.6 PIC18LF4685-I/PT.38@56.2,25.6
P39: PIC18LF4685-I/PT.39 U3a.1 | length 59
  Top Layer w0.5: v1(46,23.5) v1(46,41.8)
  Bottom Layer w0.5: U3a.1@22.2,34.945 22.675,34.945 22.5,35.12 22.5,38.9 25.5,41.9 45.9,41.9 v1(46,41.8) ; v1(46,23.5) 50.369,23.5 53.269,26.4 PIC18LF4685-I/PT.39@56.2,26.4
P40: PIC18LF4685-I/PT.40 U2a.7 | length 7.8
  Bottom Layer w0.5: U2a.7@48.45,27.325 48.475,27.35 53.852,27.35 54.002,27.2 PIC18LF4685-I/PT.40@56.2,27.2
P41: PIC18LF4685-I/PT.41 U2a.6 | length 8
  Bottom Layer w0.5: U2a.6@48.45,28.595 53.738,28.595 54.333,28 PIC18LF4685-I/PT.41@56.2,28
P42: PIC18LF4685-I/PT.42 U2a.2 | length 9.8
  Bottom Layer w0.5: U2a.2@48.45,33.675 48.5,33.625 49.84,33.625 54.665,28.8 PIC18LF4685-I/PT.42@56.2,28.8
P43: PIC18LF4685-I/PT.43 U2a.1 | length 10
  Bottom Layer w0.5: U2a.1@48.45,34.945 49.651,34.945 54.971,29.625 56.175,29.625 PIC18LF4685-I/PT.43@56.2,29.6
P44: PIC18LF4685-I/PT.44 R32.1 | length 49.5
  Top Layer w0.5: R32.1@32.5,12 R32.1@32.96,12 ; R32.1@32.585,11.375 32.585,11.625 R32.1@32.96,12 ; R32.1@33.035,12.075 R32.1@32.96,12 ; v1(47.375,37.25) 47.375,18.373 41.002,12 R32.1@32.96,12
  Bottom Layer w0.5: v1(47.375,37.25) 48.95,37.25 55.775,30.425 56.506,30.425 56.556,30.375 PIC18LF4685-I/PT.44@56.741,30.375
PGC: "Pickit 3.5" PIC18LF4685-I/PT.16 | length 46.2
  Top Layer w0.5: 88.48,2.6 88.49,2.61 88.49,27.39 v1(88.5,27.4)
  Bottom Layer w0.5: PIC18LF4685-I/PT.16@67.2,27.2 76.5,27.2 76.7,27.4 v1(88.5,27.4)
PGD: "Pickit 3.4" PIC18LF4685-I/PT.17 | length 42.6
  Top Layer w0.5: v1(85.8,26.5) 85.94,26.36 85.94,2.6
  Bottom Layer w0.5: PIC18LF4685-I/PT.17@67.2,26.4 77.1,26.4 77.25,26.55 85.75,26.55 v1(85.8,26.5)
RX: PIC18LF4685-I/PT.11 U5.4 | length 12.7
  Top Layer w0.5: v1(65.25,40.5) 65.25,34.348 66.898,32.7 v1(67,32.7)
  Bottom Layer w0.5: U5.4@65.195,38.5 65.197,38.497 65.25,38.55 v1(65.25,40.5) ; PIC18LF4685-I/PT.11@65.7,31.9 65.7,32.7 v1(67,32.7)
TS_OFF: J6.5 R78.2 T16.1 | length 16.9
  Bottom Layer w0.5: J6.5@20.95,2.4 20.95,3.559 23.6,6.209 23.6,11.375 23.6,12.5 25.25,14.15 28.6,14.15
  other v1: 23.56,11.375
TX: PIC18LF4685-I/PT.10 U5.1 | length 13.3
  Top Layer w0.5: v1(67,33.8) 69,35.8 v1(69,40.5)
  Bottom Layer w0.5: PIC18LF4685-I/PT.10@64.9,31.9 64.9,33.479 65.221,33.8 v1(67,33.8) ; v1(69,40.5) 69,38.5 69.002,38.497 U5.1@69.005,38.5
pads on no net: J4.3 J5.4 J5.5 J5.6 J6.3 J6.6 J6.9 J6.10 J7.9 J7.10 J9.5 J9.6 PIC18LF4685-I/PT.1 PIC18LF4685-I/PT.12 PIC18LF4685-I/PT.13 PIC18LF4685-I/PT.14 PIC18LF4685-I/PT.33 PIC18LF4685-I/PT.34 T10.15 T10.16 T12.15 T12.16 U1a.10 U1a.11 U1a.12 U1a.13 U5.5

## Polygon pours and split planes (outlines as drawn)
GND on Bottom Layer "Bottom Layer-GND" (solid, pour order 12): 0,0 113,0 113,67 0,67
no net on Bottom Layer "Bottom Layer-No Net" (solid, pour order 14): 57.3,30.725
GND on Top Layer "Top Layer-GND" (solid, pour order 8): 0,67 0,0 113,0 113,67

## Silkscreen, mask and mechanical layers (free items; w line width, h text height)
Top Overlay:
  text "TS_OFF" at 22,3.9 h1 r270
Bottom Overlay:
  drawing of 1840 lines, arcs and shapes, not listed
  text "Gerard Pérez- e-Tech Racing 2020" at 79,57.25 h2
  text "CANL" at 104.25,57 h1
  text "www.pro-circuits.com" at 1.2,1 h2 r270

## Text inside footprints (layer, text, board x,y; h text height)
CRYSTAL: Mechanical 13 "1" at 73.1,1.6 h1 r180; Bottom Overlay "1" at 73.1,1.6 h1 r180
DISPLAY: Top Overlay "V0" at 97.86,56.9 h1.52 r11.95; Top Overlay "C3-" at 98.41,8.2 h1.52 r17.1; Top Overlay "C2-" at 95.81,8.2 h1.52 r17.1; Top Overlay "C1-" at 93.51,8.2 h1.52 r17.1; Top Overlay "A3+" at 55.31,8.2 h1.52 r17.1; Top Overlay "A2+" at 52.81,8.2 h1.52 r17.1; Top Overlay "A1+" at 50.61,8.1 h1.52 r17.1; Mechanical 13 "A1+" at 50.61,8.1 h1.52 r17.1; Mechanical 13 "A2+" at 52.81,8.2 h1.52 r17.1; Mechanical 13 "A3+" at 55.31,8.2 h1.52 r17.1; Mechanical 13 "C1-" at 93.51,8.2 h1.52 r17.1; Mechanical 13 "C2-" at 95.81,8.2 h1.52 r17.1; Mechanical 13 "C3-" at 98.41,8.2 h1.52 r17.1; Mechanical 13 "V0" at 97.86,56.9 h1.52 r11.95
J2: Bottom Overlay "+12" at 108.6,32.9 h1; Bottom Overlay "12V" at 108.6,37.3 h1
J3: Bottom Overlay "+5" at 108.7,50.1 h1; Bottom Overlay "5V" at 108.7,45.6 h1
J4: Bottom Overlay "CANH" at 107.25,57 h1
J5: Mechanical 13 "GND" at 106.77,42.75 h1; Mechanical 13 "5V" at 106.77,40.25 h1; Bottom Overlay "GND" at 106.77,42.75 h1; Bottom Overlay "5V" at 106.77,40.25 h1
J6: Top Overlay "LED_TS" at 20.53,10.475 h1 r270; Top Overlay "3V3" at 11.03,10.675 h1 r270; Top Overlay "LED_AMS" at 15.83,10.575 h1 r270; Top Overlay "BUZZER" at 15.83,3.675 h1 r270; Top Overlay "LED_IMD" at 9.83,3.875 h1 r270
J7: Mechanical 13 "3V3" at 98.8,26.95 h1; Mechanical 13 "P22" at 98.8,24.45 h1; Mechanical 13 "P19" at 98.8,21.95 h1; Mechanical 13 "P21" at 98.8,19.45 h1; Mechanical 13 "P8" at 106.3,19.45 h1; Mechanical 13 "P9" at 106.3,21.95 h1; Mechanical 13 "P15" at 106.3,24.45 h1; Mechanical 13 "P20" at 106.3,26.95 h1; Bottom Overlay "P20" at 106.3,26.95 h1; Bottom Overlay "P15" at 106.3,24.45 h1; Bottom Overlay "P9" at 106.3,21.95 h1; Bottom Overlay "P8" at 106.3,19.45 h1; Bottom Overlay "P21" at 98.5,19 h1; Bottom Overlay "P19" at 98.5,21.5 h1; Bottom Overlay "P22" at 98.5,23.75 h1
J8: Bottom Overlay "3V3" at 43.8,4.4 h1
J9: Mechanical 13 "3V3" at 37.3,4.3 h1 r180; Bottom Overlay "3V3" at 38.9,3.7 h1